# Altium PCB Powerstage_3LFLC.PcbDoc.PcbDoc
Units mm, origin at the board's own origin, x right, y up, seen from the top; angles counter-clockwise.
Board outline 152.4 x 101.6 mm, 2 copper layers (Top Layer, Bottom Layer); 103 components, 83 nets, 327 pads, 0 vias.
Unrouted connection lines stored in the file: 226.
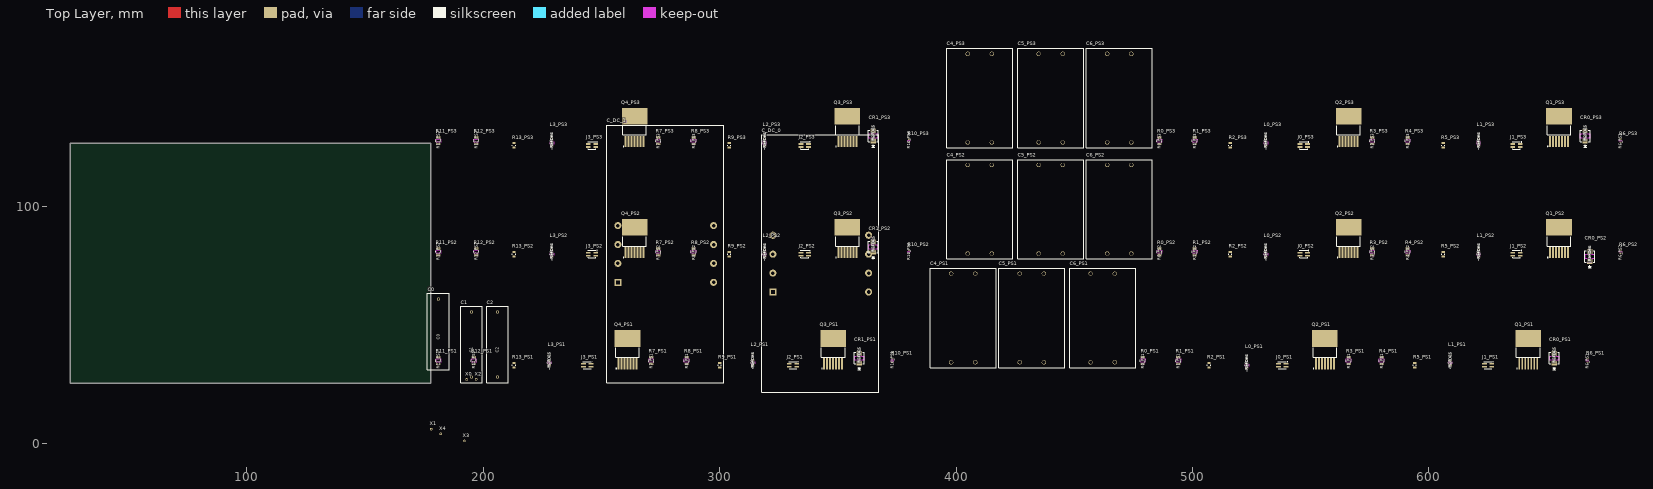
[diagram p0: Top Layer view]
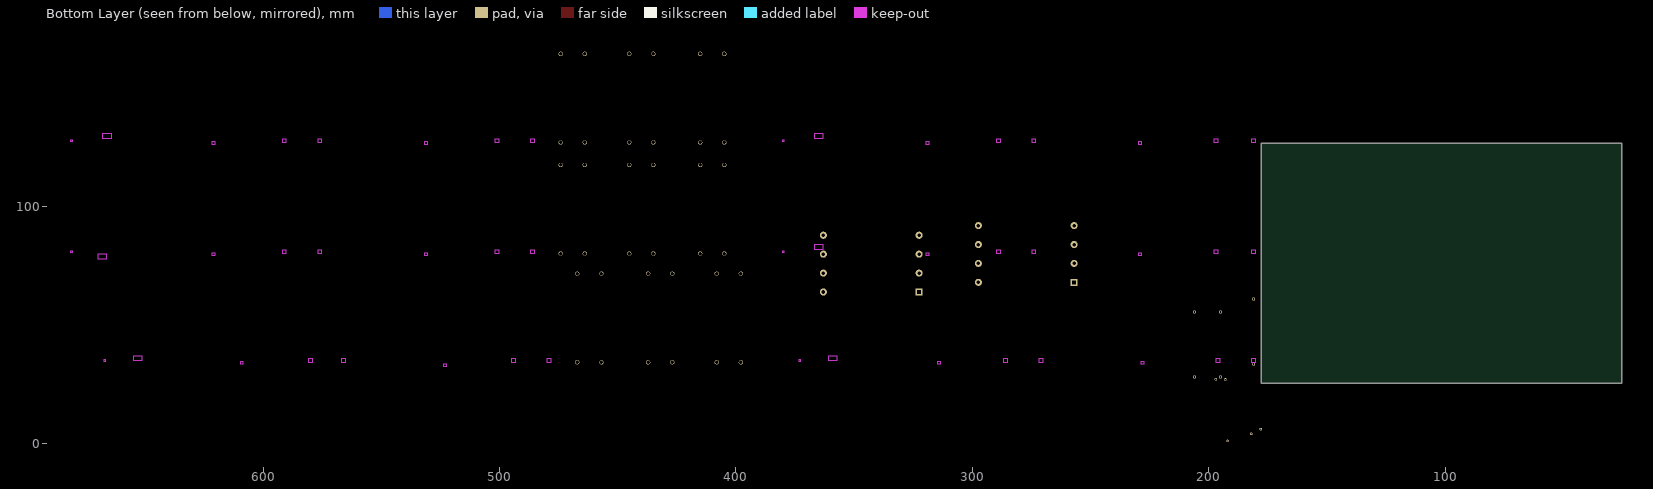
[diagram p1: Bottom Layer view, seen from below]

## Layer stack, top to bottom
Top Solder: solder mask 0.0102, Solder Resist, Dk 3.5
Top Layer: signal copper 0.0356
Dielectric 1: dielectric 0.32, FR-4, Dk 4.8
Bottom Layer: signal copper 0.0356
Bottom Solder: solder mask 0.0102, Solder Resist, Dk 3.5

## Board outline
25.4,25.4 177.8,25.4 177.8,127 25.4,127

## Design rules (kind name [scope] priority, off if disabled: settings)
Clearance [All] p1: gap=0.254 ignorepadtopadclearanceinfootprint=FALSE
PolygonConnect [All] p1: connectstyle=Relief reliefconductorwidth=0.254 reliefentries=4 polygonreliefangle="90 Angle" airgapwidth=0.254
RoutingVias [All] p1: holewidth=0.711 width=1.27 viastyle="Through Hole" minholewidth=0.711 minwidth=1.27 maxholewidth=0.711 maxwidth=1.27
SolderMaskExpansion [All] p1: expansion=0 istentingtop=FALSE
Width [All] p1: maxlimit=0.254 minlimit=0.254 preferedwidth=0.254
30 further rules are at their usual default settings.

## Classes and differential pairs
net class Phase[1..3]: Phase1 Phase2 Phase3 PS1 PS2 PS3
component class U_30_HV_Connectors: X0 X1 X2 X3 X4
component class PS3: C4_PS3 C5_PS3 C6_PS3 CR0_PS3 CR1_PS3 J0_PS3 J1_PS3 J2_PS3 J3_PS3 L0_PS3 L1_PS3 L2_PS3 L3_PS3 Q1_PS3 Q2_PS3 Q3_PS3 Q4_PS3 R0_PS3 R1_PS3 R2_PS3 R3_PS3 R4_PS3 R5_PS3 R6_PS3 R7_PS3 R8_PS3 R9_PS3 R10_PS3 R11_PS3 R12_PS3 R13_PS3
component class PS2: C4_PS2 C5_PS2 C6_PS2 CR0_PS2 CR1_PS2 J0_PS2 J1_PS2 J2_PS2 J3_PS2 L0_PS2 L1_PS2 L2_PS2 L3_PS2 Q1_PS2 Q2_PS2 Q3_PS2 Q4_PS2 R0_PS2 R1_PS2 R2_PS2 R3_PS2 R4_PS2 R5_PS2 R6_PS2 R7_PS2 R8_PS2 R9_PS2 R10_PS2 R11_PS2 R12_PS2 R13_PS2
component class PS1: C4_PS1 C5_PS1 C6_PS1 CR0_PS1 CR1_PS1 J0_PS1 J1_PS1 J2_PS1 J3_PS1 L0_PS1 L1_PS1 L2_PS1 L3_PS1 Q1_PS1 Q2_PS1 Q3_PS1 Q4_PS1 R0_PS1 R1_PS1 R2_PS1 R3_PS1 R4_PS1 R5_PS1 R6_PS1 R7_PS1 R8_PS1 R9_PS1 R10_PS1 R11_PS1 R12_PS1 R13_PS1
channel class 10_Phase: PS1 PS2 PS3
component class U_20_DC_Link: C0 C1 C2 C3 C_DC_0 C_DC_1 IC?

## Components (designator, comment, footprint, x,y, rotation, side; value= is the part's Value field where it differs from the comment)
C0 "MKP1848510084K2" CAP_8510084K2_VIS 181,33.492 r90 top
C1 "MKP1848510084K2" CAP_8510084K2_VIS 195,28 r90 top
C2 "MKP1848510084K2" CAP_8510084K2_VIS 206,28 r90 top
C4_PS1 "B32776Z4406K000" CAP_B32776Z4406K000 403,53 r90 top (schematic designator C4)
C4_PS2 "B32776Z4406K000" CAP_B32776Z4406K000 410,99 r90 top (schematic designator C4)
C4_PS3 "B32776Z4406K000" CAP_B32776Z4406K000 410,146 r90 top (schematic designator C4)
C5_PS1 "B32776Z4406K000" CAP_B32776Z4406K000 432,53 r90 top (schematic designator C5)
C5_PS2 "B32776Z4406K000" CAP_B32776Z4406K000 440,99 r90 top (schematic designator C5)
C5_PS3 "B32776Z4406K000" CAP_B32776Z4406K000 440,146 r90 top (schematic designator C5)
C6_PS1 "B32776Z4406K000" CAP_B32776Z4406K000 462,53 r90 top (schematic designator C6)
C6_PS2 "B32776Z4406K000" CAP_B32776Z4406K000 469,99 r90 top (schematic designator C6)
C6_PS3 "B32776Z4406K000" CAP_B32776Z4406K000 469,146 r90 top (schematic designator C6)
C_DC_0 "B25654A6177K001" B25654A6177K001 342.75,76 r90 top
C_DC_1 "B25654A6177K001" B25654A6177K001 277.184,80.075 r90 top
CR0_PS1 "STTH112U" SMB_STM 653,36 r90 top (schematic designator CR0)
CR0_PS2 "STTH112U" SMB_STM 668,79 r90 top (schematic designator CR0)
CR0_PS3 "STTH112U" SMB_STM 666,130 r90 top (schematic designator CR0)
CR1_PS1 "STTH112U" SMB_STM 359,36 r90 top (schematic designator CR1)
CR1_PS2 "STTH112U" SMB_STM 365,83 r90 top (schematic designator CR1)
CR1_PS3 "STTH112U" SMB_STM 365,130 r90 top (schematic designator CR1)
J0_PS1 "6230XX21021_62300421021" 62300421021 538,33 r90 top (schematic designator J0)
J0_PS2 "6230XX21021_62300421021" 62300421021 547,80 r90 top (schematic designator J0)
J0_PS3 "6230XX21021_62300421021" 62300421021 547,126 r90 top (schematic designator J0)
J1_PS1 "6230XX21021_62300421021" 62300421021 625,33 r90 top (schematic designator J1)
J1_PS2 "6230XX21021_62300421021" 62300421021 637,80 r90 top (schematic designator J1)
J1_PS3 "6230XX21021_62300421021" 62300421021 637,126 r90 top (schematic designator J1)
J2_PS1 "6230XX21021_62300421021" 62300421021 331,33 r90 top (schematic designator J2)
J2_PS2 "6230XX21021_62300421021" 62300421021 336,80 r90 top (schematic designator J2)
J2_PS3 "6230XX21021_62300421021" 62300421021 336,126 r90 top (schematic designator J2)
J3_PS1 "6230XX21021_62300421021" 62300421021 244,33 r90 top (schematic designator J3)
J3_PS2 "6230XX21021_62300421021" 62300421021 246,80 r90 top (schematic designator J3)
J3_PS3 "6230XX21021_62300421021" 62300421021 246,126 r90 top (schematic designator J3)
L0_PS1 "MPZ2012S300AT000" IND_2012_TDK 523,33.022 r90 top (schematic designator L0)
L0_PS2 "MPZ2012S300AT000" IND_2012_TDK 531,80 r90 top (schematic designator L0)
L0_PS3 "MPZ2012S300AT000" IND_2012_TDK 531,127 r90 top (schematic designator L0)
L1_PS1 "MPZ2012S300AT000" IND_2012_TDK 609,34 r90 top (schematic designator L1)
L1_PS2 "MPZ2012S300AT000" IND_2012_TDK 621,80 r90 top (schematic designator L1)
L1_PS3 "MPZ2012S300AT000" IND_2012_TDK 621,127 r90 top (schematic designator L1)
L2_PS1 "MPZ2012S300AT000" IND_2012_TDK 314,34 r90 top (schematic designator L2)
L2_PS2 "MPZ2012S300AT000" IND_2012_TDK 319,80 r90 top (schematic designator L2)
L2_PS3 "MPZ2012S300AT000" IND_2012_TDK 319,127 r90 top (schematic designator L2)
L3_PS1 "MPZ2012S300AT000" IND_2012_TDK 228,34 r90 top (schematic designator L3)
L3_PS2 "MPZ2012S300AT000" IND_2012_TDK 229,80 r90 top (schematic designator L3)
L3_PS3 "MPZ2012S300AT000" IND_2012_TDK 229,127 r90 top (schematic designator L3)
Q1_PS1 "IMBG120R026M2H" TO127P1500X470-8N-2-V1 642,39 r90 top (schematic designator Q1)
Q1_PS2 "IMBG120R026M2H" TO127P1500X470-8N-2-V1 655,86 r90 top (schematic designator Q1)
Q1_PS3 "IMBG120R026M2H" TO127P1500X470-8N-2-V1 655,133 r90 top (schematic designator Q1)
Q2_PS1 "IMBG120R026M2H" TO127P1500X470-8N-2-V1 556,39 r90 top (schematic designator Q2)
Q2_PS2 "IMBG120R026M2H" TO127P1500X470-8N-2-V1 566,86 r90 top (schematic designator Q2)
Q2_PS3 "IMBG120R026M2H" TO127P1500X470-8N-2-V1 566,133 r90 top (schematic designator Q2)
Q3_PS1 "IMBG120R026M2H" TO127P1500X470-8N-2-V1 348,39 r90 top (schematic designator Q3)
Q3_PS2 "IMBG120R026M2H" TO127P1500X470-8N-2-V1 354,86 r90 top (schematic designator Q3)
Q3_PS3 "IMBG120R026M2H" TO127P1500X470-8N-2-V1 354,133 r90 top (schematic designator Q3)
Q4_PS1 "IMBG120R026M2H" TO127P1500X470-8N-2-V1 261,39 r90 top (schematic designator Q4)
Q4_PS2 "IMBG120R026M2H" TO127P1500X470-8N-2-V1 264,86 r90 top (schematic designator Q4)
Q4_PS3 "IMBG120R026M2H" TO127P1500X470-8N-2-V1 264,133 r90 top (schematic designator Q4)
R0_PS1 "HCJ1206ZT0R00" RES_HCJ1206_STP 479,35 r90 top (schematic designator R0)
R0_PS2 "HCJ1206ZT0R00" RES_HCJ1206_STP 486,81 r90 top (schematic designator R0)
R0_PS3 "HCJ1206ZT0R00" RES_HCJ1206_STP 486,128 r90 top (schematic designator R0)
R1_PS1 "HCJ1206ZT0R00" RES_HCJ1206_STP 494,35 r90 top (schematic designator R1)
R1_PS2 "HCJ1206ZT0R00" RES_HCJ1206_STP 501,81 r90 top (schematic designator R1)
R1_PS3 "HCJ1206ZT0R00" RES_HCJ1206_STP 501,128 r90 top (schematic designator R1)
R2_PS1 "AF0805FR-07130RL" RESC2012X60N 507,33 r90 top (schematic designator R2)
R2_PS2 "AF0805FR-07130RL" RESC2012X60N 516,80 r90 top (schematic designator R2)
R2_PS3 "AF0805FR-07130RL" RESC2012X60N 516,126 r90 top (schematic designator R2)
R3_PS1 "HCJ1206ZT0R00" RES_HCJ1206_STP 566,35 r90 top (schematic designator R3)
R3_PS2 "HCJ1206ZT0R00" RES_HCJ1206_STP 576,81 r90 top (schematic designator R3)
R3_PS3 "HCJ1206ZT0R00" RES_HCJ1206_STP 576,128 r90 top (schematic designator R3)
R4_PS1 "HCJ1206ZT0R00" RES_HCJ1206_STP 580,35 r90 top (schematic designator R4)
R4_PS2 "HCJ1206ZT0R00" RES_HCJ1206_STP 591,81 r90 top (schematic designator R4)
R4_PS3 "HCJ1206ZT0R00" RES_HCJ1206_STP 591,128 r90 top (schematic designator R4)
R5_PS1 "AF0805FR-07130RL" RESC2012X60N 594,33 r90 top (schematic designator R5)
R5_PS2 "AF0805FR-07130RL" RESC2012X60N 606,80 r90 top (schematic designator R5)
R5_PS3 "AF0805FR-07130RL" RESC2012X60N 606,126 r90 top (schematic designator R5)
R6_PS1 "TFCR0603-10W-E-1001BT-1K" RES_TFCR0603_VEN 667,35 r90 top (schematic designator R6)
R6_PS2 "TFCR0603-10W-E-1001BT-1K" RES_TFCR0603_VEN 681,81 r90 top (schematic designator R6)
R6_PS3 "TFCR0603-10W-E-1001BT-1K" RES_TFCR0603_VEN 681,128 r90 top (schematic designator R6)
R7_PS1 "HCJ1206ZT0R00" RES_HCJ1206_STP 271,35 r90 top (schematic designator R7)
R7_PS2 "HCJ1206ZT0R00" RES_HCJ1206_STP 274,81 r90 top (schematic designator R7)
R7_PS3 "HCJ1206ZT0R00" RES_HCJ1206_STP 274,128 r90 top (schematic designator R7)
R8_PS1 "HCJ1206ZT0R00" RES_HCJ1206_STP 286,35 r90 top (schematic designator R8)
R8_PS2 "HCJ1206ZT0R00" RES_HCJ1206_STP 289,81 r90 top (schematic designator R8)
R8_PS3 "HCJ1206ZT0R00" RES_HCJ1206_STP 289,128 r90 top (schematic designator R8)
R9_PS1 "AF0805FR-07130RL" RESC2012X60N 300,33 r90 top (schematic designator R9)
R9_PS2 "AF0805FR-07130RL" RESC2012X60N 304,80 r90 top (schematic designator R9)
R9_PS3 "AF0805FR-07130RL" RESC2012X60N 304,126 r90 top (schematic designator R9)
R10_PS1 "TFCR0603-10W-E-1001BT-1K" RES_TFCR0603_VEN 373,35 r90 top (schematic designator R10)
R10_PS2 "TFCR0603-10W-E-1001BT-1K" RES_TFCR0603_VEN 380,81 r90 top (schematic designator R10)
R10_PS3 "TFCR0603-10W-E-1001BT-1K" RES_TFCR0603_VEN 380,128 r90 top (schematic designator R10)
R11_PS1 "HCJ1206ZT0R00" RES_HCJ1206_STP 181,35 r90 top (schematic designator R11)
R11_PS2 "HCJ1206ZT0R00" RES_HCJ1206_STP 181,81 r90 top (schematic designator R11)
R11_PS3 "HCJ1206ZT0R00" RES_HCJ1206_STP 181,128 r90 top (schematic designator R11)
R12_PS1 "HCJ1206ZT0R00" RES_HCJ1206_STP 196,35 r90 top (schematic designator R12)
R12_PS2 "HCJ1206ZT0R00" RES_HCJ1206_STP 197,81 r90 top (schematic designator R12)
R12_PS3 "HCJ1206ZT0R00" RES_HCJ1206_STP 197,128 r90 top (schematic designator R12)
R13_PS1 "AF0805FR-07130RL" RESC2012X60N 213,33 r90 top (schematic designator R13)
R13_PS2 "AF0805FR-07130RL" RESC2012X60N 213,80 r90 top (schematic designator R13)
R13_PS3 "AF0805FR-07130RL" RESC2012X60N 213,126 r90 top (schematic designator R13)
X0 "1379-1" CONN_1379-1_KEY 193,27 r0 top
X1 "1379-1" CONN_1379-1_KEY 178,6 r0 top
X2 "1379-1" CONN_1379-1_KEY 197,27 r0 top
X3 "1379-1" CONN_1379-1_KEY 192,1 r0 top
X4 "1379-1" CONN_1379-1_KEY 182,4 r0 top

## Footprints (in the part's own frame and the unit in brackets; to place one, negate y for a bottom-side part, rotate by r counter-clockwise, add the part's x,y. Pads: shape width x height; smd on the part's side, far side on the other; paste and mask are expansions set on the pad)
62300421021 [mm]
  rect 0.76x2.05 smd paste+0 mask+0.102: 1(0.635,-1.575) 2(0.635,1.575) 3(-0.635,-1.575) 4(-0.635,1.575)
  silkscreen extent -1.57,-2.2 1.59,1.65, body extent -1.49,-2.33 1.45,2.26, height 2.15
B25654A6177K001 [mm]
  rect 3x3 hole 1.5 square: 1(-12,20.25)
  round 3 hole 1.5: 1(-4,20.25) 1(4,20.25) 1(12,20.25) 2(-12,-20.25) 2(-4,-20.25) 2(4,-20.25) 2(12,-20.25)
  silkscreen extent -54.5,-24.5 54.5,25, body extent -54.5,-24.72 54.5,24.72, height 6
CAP_8510084K2_VIS [mil]
  round 52 hole 32 paste-99999 mask+0: 1(0,0) 2(1083,0)
  silkscreen extent -94,-182 1176,182, body extent -89,-177 1171,177, height 752
CAP_B32776Z4406K000 [mm]
  round 1.8 hole 1.45 mask+0.102: 1(-18.75,-5.1) 1(-18.75,5.1) 2(18.75,-5.1) 2(18.75,5.1)
  silkscreen extent -21,-14 21,14, body extent -21,-14 21,14, height 37
CONN_1379-1_KEY [mil]
  round 42 / inner round 60 / far side round 42 hole 22 paste-99999 mask+0: 1(0,0)
IND_2012_TDK [mm]
  rect 0.956x1.45 smd paste+0 mask+0: 1(-0.978,0) 2(0.978,0)
  Top Layer keep-out region: -0.449,-0.674 -0.449,0.674 0.449,0.674 0.449,-0.674
  Keep-Out Layer region: -0.449,-0.725 -0.449,0.725 0.449,0.725 0.449,-0.725
  silkscreen extent -2.37,-0.85 0.19,0.85, body extent -1.1,-0.72 1.1,0.72, height 1.1
RES_HCJ1206_STP [mil]
  rect 47x73 smd paste+0 mask+0: 1(-52.5,0) 2(52.5,0)
  Top Layer keep-out region: -27,-34.5 -27,34.5 27,34.5 27,-34.5
  Keep-Out Layer region: -27,-36.5 -27,36.5 27,36.5 27,-36.5
  silkscreen extent -17,-42 17,42, body extent -68,-36 68,36, height 34
RES_TFCR0603_VEN [mil]
  rect 28x35 smd paste+0 mask+0: 1(-26.5,0) 2(26.5,0)
  Top Layer keep-out region: -10.5,-15.5 -10.5,15.5 10.5,15.5 10.5,-15.5
  Keep-Out Layer region: -10.5,-17.5 -10.5,17.5 10.5,17.5 10.5,-17.5
  body extent -33,-17 33,17, height 22
RESC2012X60N [mm]
  rect 0.92x1.38 smd paste+0 mask+0.102: 1(-0.955,0) 2(0.955,0)
  silkscreen extent -0.17,-0.68 0.17,0.68, body extent -1,-0.63 1,0.63, height 0.6
SMB_STM [mil]
  rect 86.56x88.97 smd paste+0 mask+0: 1(-80.5,0) 2(80.5,0)
  Top Layer keep-out region: -35.22,-76 -35.22,76 35.22,76 35.22,-76
  Keep-Out Layer region: -35.22,-76 -35.22,76 35.22,76 35.22,-76
  silkscreen extent -199,-83 96,83, body extent -110,-78 110,78, height 104
TO127P1500X470-8N-2-V1 [mm] "TO,1.27mm pitch;7 pin,15.00mm L X 9.25mm W X 4.70mm H body"
  rect 4.7x0.8 smd paste-0.05 mask+0: 1(-5.35,3.81) 2(-5.35,2.54) 3(-5.35,1.27) 4(-5.35,0) 5(-5.35,-1.27) 6(-5.35,-2.54) 7(-5.35,-3.81)
  rect 7.1x10.8 smd paste-3.55 mask+0: 8(5.35,0)
  silkscreen extent -7.52,-5 1.4,5, body extent -6.4,-5 8.55,5, height 4.51

## Part data
C0: "MKP 1848 1µF", Manufacturer_Name=Vishay, Copyright="Copyright (C) 2025 Ultra Librarian. All rights reserved.", Manufacturer_Part_Number=MKP1848510084K2
C1 C2: "MKP 1848 1ÂµF Â±5% 800V=", Manufacturer_Name=Vishay, Copyright="Copyright (C) 2025 Ultra Librarian. All rights reserved.", Manufacturer_Part_Number=MKP1848510084K2
C4_PS1 C4_PS2 C4_PS3 C5_PS1 C5_PS2 C5_PS3 C6_PS1 C6_PS2 C6_PS3: "40 ÂµF Film Capacitor 500V Polypropylene (PP), Metallized Radial - 4 Leads", Package="NON-STANDARD-4 EPCOS", Check_prices=https://www.snapeda.com/parts/B32776Z4406K000/EPCOS/view-part/?ref=eda, MF=EPCOS, MP=B32776Z4406K000, SnapEDA_Link=https://www.snapeda.com/parts/B32776Z4406K000/EPCOS/view-part/?ref=snap
CR0_PS1 CR0_PS2 CR0_PS3 CR1_PS1 CR1_PS2 CR1_PS3: "1200 V, 1A Ultrafast Diode", Manufacturer_Name=STMicroelectronics, Copyright="Copyright (C) 2025 Ultra Librarian. All rights reserved.", Manufacturer_Part_Number=STTH112U
J0_PS1 J0_PS2 J0_PS3 J1_PS1 J1_PS2 J1_PS3 J2_PS1 J2_PS2 J2_PS3 J3_PS1 J3_PS2 J3_PS3: "WR-PHD 1.27 mm Dual SMT Socket Header H=4.50mm", Package=None, Check_prices=https://www.snapeda.com/parts/62300421021/Wurth+Electronics/view-part/?ref=eda, MF="Wurth Elektronik", MP=62300421021, SnapEDA_Link=https://www.snapeda.com/parts/62300421021/Wurth+Electronics/view-part/?ref=snap
L0_PS1 L0_PS2 L0_PS3 L1_PS1 L1_PS2 L1_PS3 L2_PS1 L2_PS2 L2_PS3 L3_PS1 L3_PS2 L3_PS3: "Description", Manufacturer_Name=TDK, Copyright="Copyright (C) 2025 Ultra Librarian. All rights reserved.", Manufacturer_Part_Number=MPZ2012S300AT000
Q1_PS1 Q1_PS2 Q1_PS3 Q2_PS1 Q2_PS2 Q2_PS3 Q3_PS1 Q3_PS2 Q3_PS3 Q4_PS1 Q4_PS2 Q4_PS3: "Insulated-Gate Field-Effect Transistor (IGFET), N-Channel, Enhancement, Body Diode, Pin 1 Gate, 2 Sense, 3 Source, 4 Source, 5 Source, 6 Source, 7 Source, 8 Drain, 8 Pins", Manufacturer="Infineon Technologies", Package Reference=PG-TO263-7-12, Manufacturer Order Number=IMBG120R026M2H
R0_PS1 R0_PS2 R0_PS3 R1_PS1 R1_PS2 R1_PS3 R3_PS1 R3_PS2 R3_PS3 R4_PS1 R4_PS2 R4_PS3 R7_PS1 R7_PS2 R7_PS3 R8_PS1 R8_PS2 R8_PS3 R11_PS1 R11_PS2 R11_PS3 R12_PS1 R12_PS2 R12_PS3: "Description", Manufacturer_Name="Stackpole International", Copyright="Copyright (C) 2025 Ultra Librarian. All rights reserved.", Manufacturer_Part_Number=HCJ1206ZT0R00
R2_PS1 R2_PS2 R2_PS3 R5_PS1 R5_PS2 R5_PS3 R9_PS1 R9_PS2 R9_PS3 R13_PS1 R13_PS2 R13_PS3: "130 Ohms Â±1% 0.125W, 1/8W Chip Resistor 0805 (2012 Metric) Anti-Sulfur, Automotive AEC-Q200 Thick Film", Package="2012 Yageo", Check_prices=https://www.snapeda.com/parts/AF0805FR-07130RL/Yageo/view-part/?ref=eda, MF=Yageo, MP=AF0805FR-07130RL, SnapEDA_Link=https://www.snapeda.com/parts/AF0805FR-07130RL/Yageo/view-part/?ref=snap
R6_PS1 R6_PS2 R6_PS3 R10_PS1 R10_PS2 R10_PS3: "No Description Available", Manufacturer_Name=Venkel, Copyright="Copyright (C) 2026 Ultra Librarian. All rights reserved.", Manufacturer_Part_Number=TFCR0603-10W-E-1001BT-1K
X0 X1 X2 X3 X4: "Description", Manufacturer_Name="Keystone Electronics", Copyright="Copyright (C) 2025 Ultra Librarian. All rights reserved.", Manufacturer_Part_Number=1379-1, RefDes=RefDes, Type=Type

## Nets (pads, with @x,y where several pads share a name; then routed paths per layer and width w, separated by ;. In a path a pad name is that pad's centre, name@x,y a point inside that pad or via, vN(x,y) a via of type N, cw(c..) or ccw(c..) an arc to the next point about the centre after c; other vN are vias at no path point)
"0 V": C0.1 C1.1 C2.1 C_DC_0.2 C_DC_1.2 Q4_PS1.3 Q4_PS1.4 Q4_PS1.5 Q4_PS1.6 Q4_PS1.7 Q4_PS2.3 Q4_PS2.4 Q4_PS2.5 Q4_PS2.6 Q4_PS2.7 Q4_PS3.3 Q4_PS3.4 Q4_PS3.5 Q4_PS3.6 Q4_PS3.7 X1.1
"+800 V": C0.2 C1.2 C2.2 C_DC_0.1 C_DC_1.1 CR0_PS1.2 CR0_PS2.2 CR0_PS3.2 Q1_PS1.8 Q1_PS2.8 Q1_PS3.8 X0.1
NetC4_PS1_1: C4_PS1.1 C5_PS1.1 C6_PS1.1 Q3_PS1.3 Q3_PS1.4 Q3_PS1.5 Q3_PS1.6 Q3_PS1.7 Q4_PS1.8
NetC4_PS1_2: C4_PS1.2 C5_PS1.2 C6_PS1.2 Q1_PS1.3 Q1_PS1.4 Q1_PS1.5 Q1_PS1.6 Q1_PS1.7 Q2_PS1.8
NetC4_PS2_1: C4_PS2.1 C5_PS2.1 C6_PS2.1 Q3_PS2.3 Q3_PS2.4 Q3_PS2.5 Q3_PS2.6 Q3_PS2.7 Q4_PS2.8
NetC4_PS2_2: C4_PS2.2 C5_PS2.2 C6_PS2.2 Q1_PS2.3 Q1_PS2.4 Q1_PS2.5 Q1_PS2.6 Q1_PS2.7 Q2_PS2.8
NetC4_PS3_1: C4_PS3.1 C5_PS3.1 C6_PS3.1 Q3_PS3.3 Q3_PS3.4 Q3_PS3.5 Q3_PS3.6 Q3_PS3.7 Q4_PS3.8
NetC4_PS3_2: C4_PS3.2 C5_PS3.2 C6_PS3.2 Q1_PS3.3 Q1_PS3.4 Q1_PS3.5 Q1_PS3.6 Q1_PS3.7 Q2_PS3.8
NetCR0_PS1_1: CR0_PS1.1 R6_PS1.2
NetCR0_PS2_1: CR0_PS2.1 R6_PS2.2
NetCR0_PS3_1: CR0_PS3.1 R6_PS3.2
NetCR1_PS1_1: CR1_PS1.1 R10_PS1.2
NetCR1_PS2_1: CR1_PS2.1 R10_PS2.2
NetCR1_PS3_1: CR1_PS3.1 R10_PS3.2
NetJ0_PS1_1: J0_PS1.1 R2_PS1.2
NetJ0_PS1_2: J0_PS1.2 R0_PS1.2
NetJ0_PS1_4: J0_PS1.4 R1_PS1.2
NetJ0_PS2_1: J0_PS2.1 R2_PS2.2
NetJ0_PS2_2: J0_PS2.2 R0_PS2.2
NetJ0_PS2_4: J0_PS2.4 R1_PS2.2
NetJ0_PS3_1: J0_PS3.1 R2_PS3.2
NetJ0_PS3_2: J0_PS3.2 R0_PS3.2
NetJ0_PS3_4: J0_PS3.4 R1_PS3.2
NetJ1_PS1_1: J1_PS1.1 R5_PS1.2
NetJ1_PS1_2: J1_PS1.2 R3_PS1.2
NetJ1_PS1_3: J1_PS1.3 R6_PS1.1
NetJ1_PS1_4: J1_PS1.4 R4_PS1.2
NetJ1_PS2_1: J1_PS2.1 R5_PS2.2
NetJ1_PS2_2: J1_PS2.2 R3_PS2.2
NetJ1_PS2_3: J1_PS2.3 R6_PS2.1
NetJ1_PS2_4: J1_PS2.4 R4_PS2.2
NetJ1_PS3_1: J1_PS3.1 R5_PS3.2
NetJ1_PS3_2: J1_PS3.2 R3_PS3.2
NetJ1_PS3_3: J1_PS3.3 R6_PS3.1
NetJ1_PS3_4: J1_PS3.4 R4_PS3.2
NetJ2_PS1_1: J2_PS1.1 R9_PS1.2
NetJ2_PS1_2: J2_PS1.2 R7_PS1.2
NetJ2_PS1_3: J2_PS1.3 R10_PS1.1
NetJ2_PS1_4: J2_PS1.4 R8_PS1.2
NetJ2_PS2_1: J2_PS2.1 R9_PS2.2
NetJ2_PS2_2: J2_PS2.2 R7_PS2.2
NetJ2_PS2_3: J2_PS2.3 R10_PS2.1
NetJ2_PS2_4: J2_PS2.4 R8_PS2.2
NetJ2_PS3_1: J2_PS3.1 R9_PS3.2
NetJ2_PS3_2: J2_PS3.2 R7_PS3.2
NetJ2_PS3_3: J2_PS3.3 R10_PS3.1
NetJ2_PS3_4: J2_PS3.4 R8_PS3.2
NetJ3_PS1_1: J3_PS1.1 R13_PS1.2
NetJ3_PS1_2: J3_PS1.2 R11_PS1.2
NetJ3_PS1_4: J3_PS1.4 R12_PS1.2
NetJ3_PS2_1: J3_PS2.1 R13_PS2.2
NetJ3_PS2_2: J3_PS2.2 R11_PS2.2
NetJ3_PS2_4: J3_PS2.4 R12_PS2.2
NetJ3_PS3_1: J3_PS3.1 R13_PS3.2
NetJ3_PS3_2: J3_PS3.2 R11_PS3.2
NetJ3_PS3_4: J3_PS3.4 R12_PS3.2
NetL0_PS1_1: L0_PS1.1 Q2_PS1.1
NetL0_PS1_2: L0_PS1.2 R0_PS1.1 R1_PS1.1 R2_PS1.1
NetL0_PS2_1: L0_PS2.1 Q2_PS2.1
NetL0_PS2_2: L0_PS2.2 R0_PS2.1 R1_PS2.1 R2_PS2.1
NetL0_PS3_1: L0_PS3.1 Q2_PS3.1
NetL0_PS3_2: L0_PS3.2 R0_PS3.1 R1_PS3.1 R2_PS3.1
NetL1_PS1_1: L1_PS1.1 Q1_PS1.1
NetL1_PS1_2: L1_PS1.2 R3_PS1.1 R4_PS1.1 R5_PS1.1
NetL1_PS2_1: L1_PS2.1 Q1_PS2.1
NetL1_PS2_2: L1_PS2.2 R3_PS2.1 R4_PS2.1 R5_PS2.1
NetL1_PS3_1: L1_PS3.1 Q1_PS3.1
NetL1_PS3_2: L1_PS3.2 R3_PS3.1 R4_PS3.1 R5_PS3.1
NetL2_PS1_1: L2_PS1.1 Q3_PS1.1
NetL2_PS1_2: L2_PS1.2 R7_PS1.1 R8_PS1.1 R9_PS1.1
NetL2_PS2_1: L2_PS2.1 Q3_PS2.1
NetL2_PS2_2: L2_PS2.2 R7_PS2.1 R8_PS2.1 R9_PS2.1
NetL2_PS3_1: L2_PS3.1 Q3_PS3.1
NetL2_PS3_2: L2_PS3.2 R7_PS3.1 R8_PS3.1 R9_PS3.1
NetL3_PS1_1: L3_PS1.1 Q4_PS1.1
NetL3_PS1_2: L3_PS1.2 R11_PS1.1 R12_PS1.1 R13_PS1.1
NetL3_PS2_1: L3_PS2.1 Q4_PS2.1
NetL3_PS2_2: L3_PS2.2 R11_PS2.1 R12_PS2.1 R13_PS2.1
NetL3_PS3_1: L3_PS3.1 Q4_PS3.1
NetL3_PS3_2: L3_PS3.2 R11_PS3.1 R12_PS3.1 R13_PS3.1
Phase1: CR1_PS1.2 Q2_PS1.3 Q2_PS1.4 Q2_PS1.5 Q2_PS1.6 Q2_PS1.7 Q3_PS1.8 X2.1
Phase2: CR1_PS2.2 Q2_PS2.3 Q2_PS2.4 Q2_PS2.5 Q2_PS2.6 Q2_PS2.7 Q3_PS2.8 X3.1
Phase3: CR1_PS3.2 Q2_PS3.3 Q2_PS3.4 Q2_PS3.5 Q2_PS3.6 Q2_PS3.7 Q3_PS3.8 X4.1
pads on no net: J0_PS1.3 J0_PS2.3 J0_PS3.3 J3_PS1.3 J3_PS2.3 J3_PS3.3 Q1_PS1.2 Q1_PS2.2 Q1_PS3.2 Q2_PS1.2 Q2_PS2.2 Q2_PS3.2 Q3_PS1.2 Q3_PS2.2 Q3_PS3.2 Q4_PS1.2 Q4_PS2.2 Q4_PS3.2

## Text inside footprints (layer, text, board x,y; h text height)
CR0_PS1: Top Overlay "RefDes" at 653.635,34.095 h1.27 r90; Top Overlay "REFDES" at 653.635,33.778 h1.27 r90; Mechanical 13 "RefDes2" at 653.635,33.778 h1.27 r90
CR0_PS2: Top Overlay "RefDes" at 668.635,77.095 h1.27 r90; Top Overlay "REFDES" at 668.635,76.777 h1.27 r90; Mechanical 13 "RefDes2" at 668.635,76.777 h1.27 r90
CR0_PS3: Top Overlay "RefDes" at 666.635,128.095 h1.27 r90; Top Overlay "REFDES" at 666.635,127.778 h1.27 r90; Mechanical 13 "RefDes2" at 666.635,127.778 h1.27 r90
CR1_PS1: Top Overlay "RefDes" at 359.635,34.095 h1.27 r90; Top Overlay "REFDES" at 359.635,33.778 h1.27 r90; Mechanical 13 "RefDes2" at 359.635,33.778 h1.27 r90
CR1_PS2: Top Overlay "RefDes" at 365.635,81.095 h1.27 r90; Top Overlay "REFDES" at 365.635,80.778 h1.27 r90; Mechanical 13 "RefDes2" at 365.635,80.778 h1.27 r90
CR1_PS3: Top Overlay "RefDes" at 365.635,128.095 h1.27 r90; Top Overlay "REFDES" at 365.635,127.778 h1.27 r90; Mechanical 13 "RefDes2" at 365.635,127.778 h1.27 r90
L0_PS1: Top Overlay "REFDES" at 523.635,30.8 h1.27 r90; Top Overlay "RefDes" at 523.635,31.117 h1.27 r90; Mechanical 13 "RefDes2" at 523.635,30.8 h1.27 r90
L0_PS2: Top Overlay "REFDES" at 531.635,77.778 h1.27 r90; Top Overlay "RefDes" at 531.635,78.095 h1.27 r90; Mechanical 13 "RefDes2" at 531.635,77.778 h1.27 r90
L0_PS3: Top Overlay "REFDES" at 531.635,124.778 h1.27 r90; Top Overlay "RefDes" at 531.635,125.095 h1.27 r90; Mechanical 13 "RefDes2" at 531.635,124.778 h1.27 r90
L1_PS1: Top Overlay "REFDES" at 609.635,31.778 h1.27 r90; Top Overlay "RefDes" at 609.635,32.095 h1.27 r90; Mechanical 13 "RefDes2" at 609.635,31.778 h1.27 r90
L1_PS2: Top Overlay "REFDES" at 621.635,77.778 h1.27 r90; Top Overlay "RefDes" at 621.635,78.095 h1.27 r90; Mechanical 13 "RefDes2" at 621.635,77.778 h1.27 r90
L1_PS3: Top Overlay "REFDES" at 621.635,124.778 h1.27 r90; Top Overlay "RefDes" at 621.635,125.095 h1.27 r90; Mechanical 13 "RefDes2" at 621.635,124.778 h1.27 r90
L2_PS1: Top Overlay "REFDES" at 314.635,31.778 h1.27 r90; Top Overlay "RefDes" at 314.635,32.095 h1.27 r90; Mechanical 13 "RefDes2" at 314.635,31.778 h1.27 r90
L2_PS2: Top Overlay "REFDES" at 319.635,77.778 h1.27 r90; Top Overlay "RefDes" at 319.635,78.095 h1.27 r90; Mechanical 13 "RefDes2" at 319.635,77.778 h1.27 r90
L2_PS3: Top Overlay "REFDES" at 319.635,124.778 h1.27 r90; Top Overlay "RefDes" at 319.635,125.095 h1.27 r90; Mechanical 13 "RefDes2" at 319.635,124.778 h1.27 r90
L3_PS1: Top Overlay "REFDES" at 228.635,31.778 h1.27 r90; Top Overlay "RefDes" at 228.635,32.095 h1.27 r90; Mechanical 13 "RefDes2" at 228.635,31.778 h1.27 r90
L3_PS2: Top Overlay "REFDES" at 229.635,77.778 h1.27 r90; Top Overlay "RefDes" at 229.635,78.095 h1.27 r90; Mechanical 13 "RefDes2" at 229.635,77.778 h1.27 r90
L3_PS3: Top Overlay "REFDES" at 229.635,124.778 h1.27 r90; Top Overlay "RefDes" at 229.635,125.095 h1.27 r90; Mechanical 13 "RefDes2" at 229.635,124.778 h1.27 r90